# Altium PCB 音频加法器.PcbDoc
Units mm, origin at the board's own origin, x right, y up, seen from the top; angles counter-clockwise.
Board outline 50 x 40 mm, 2 copper layers (Top Layer, Bottom Layer); 14 components, 9 nets, 35 pads, 7 vias.
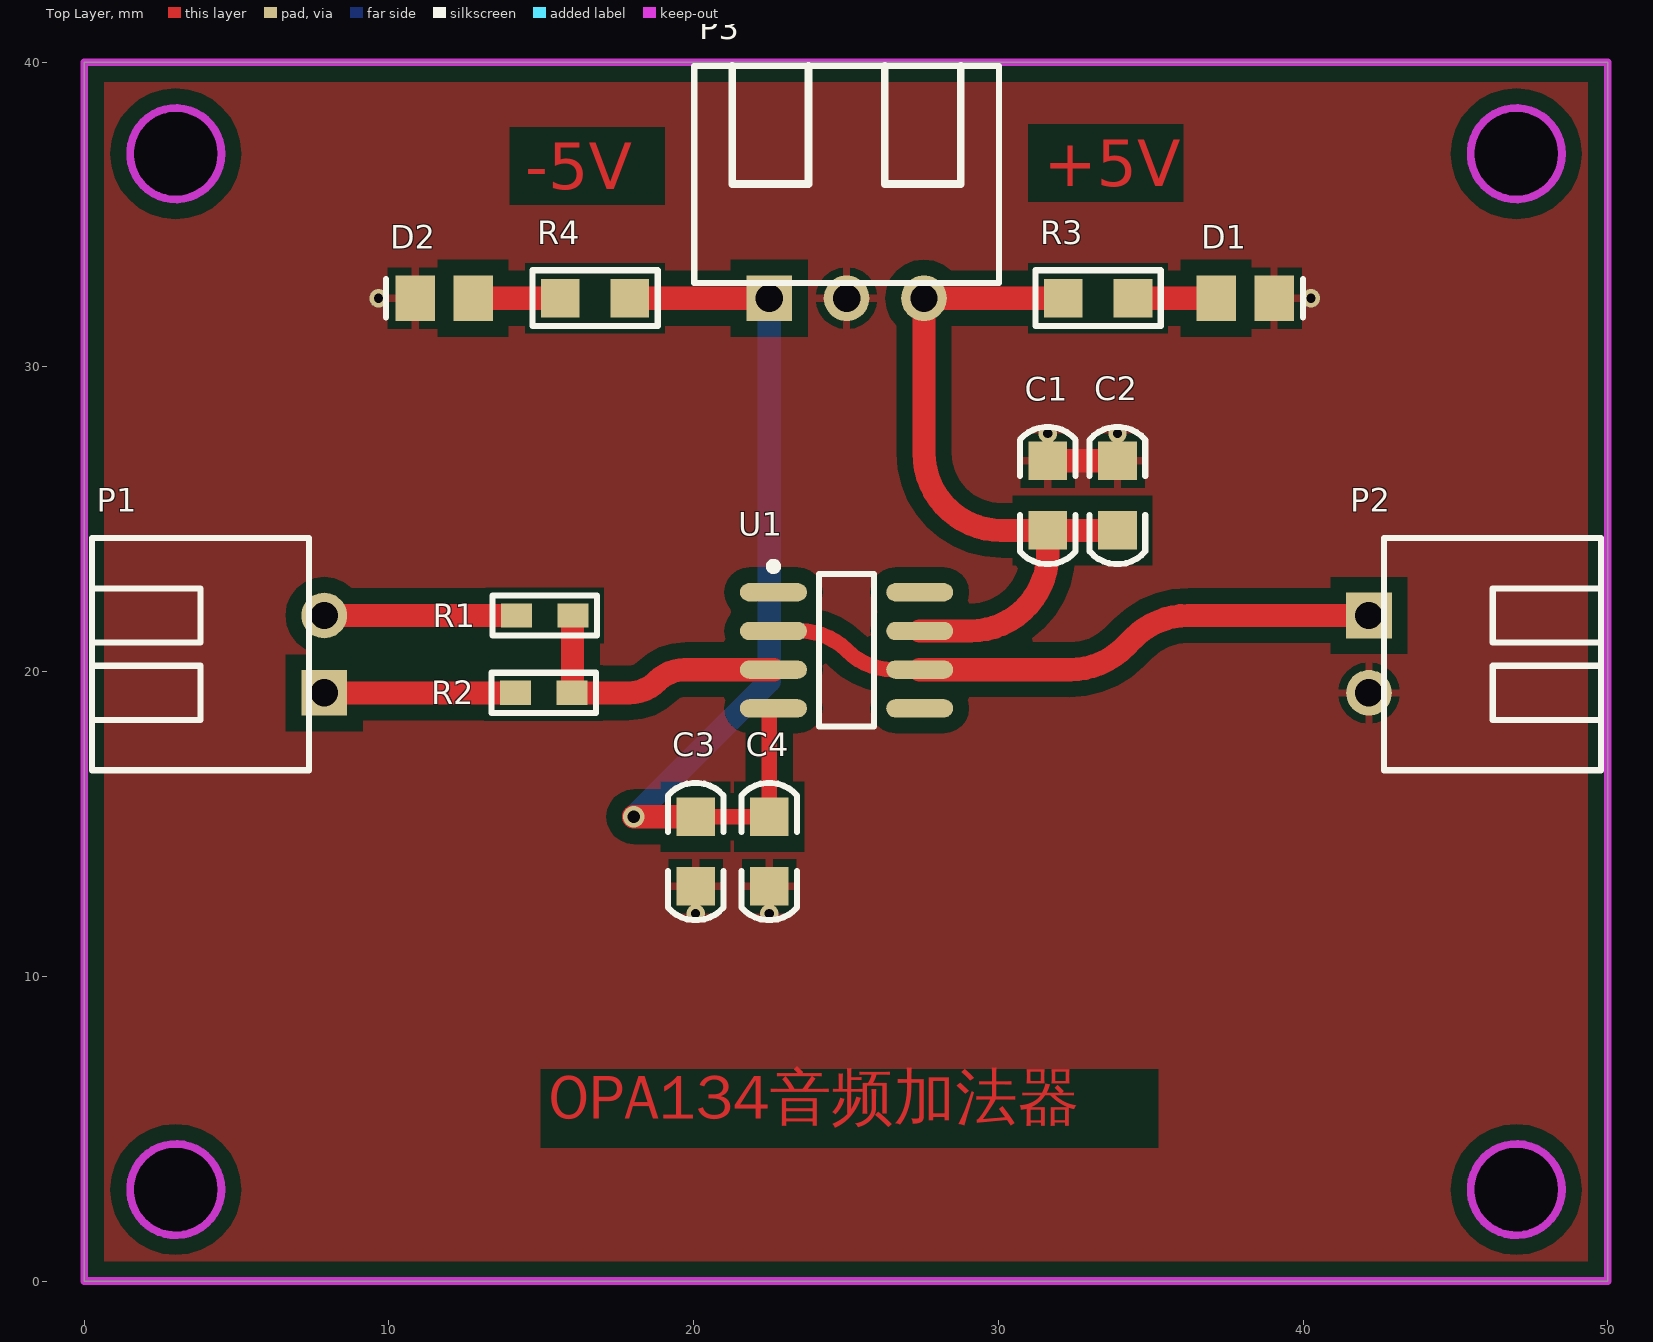
[diagram p0: Top Layer view]
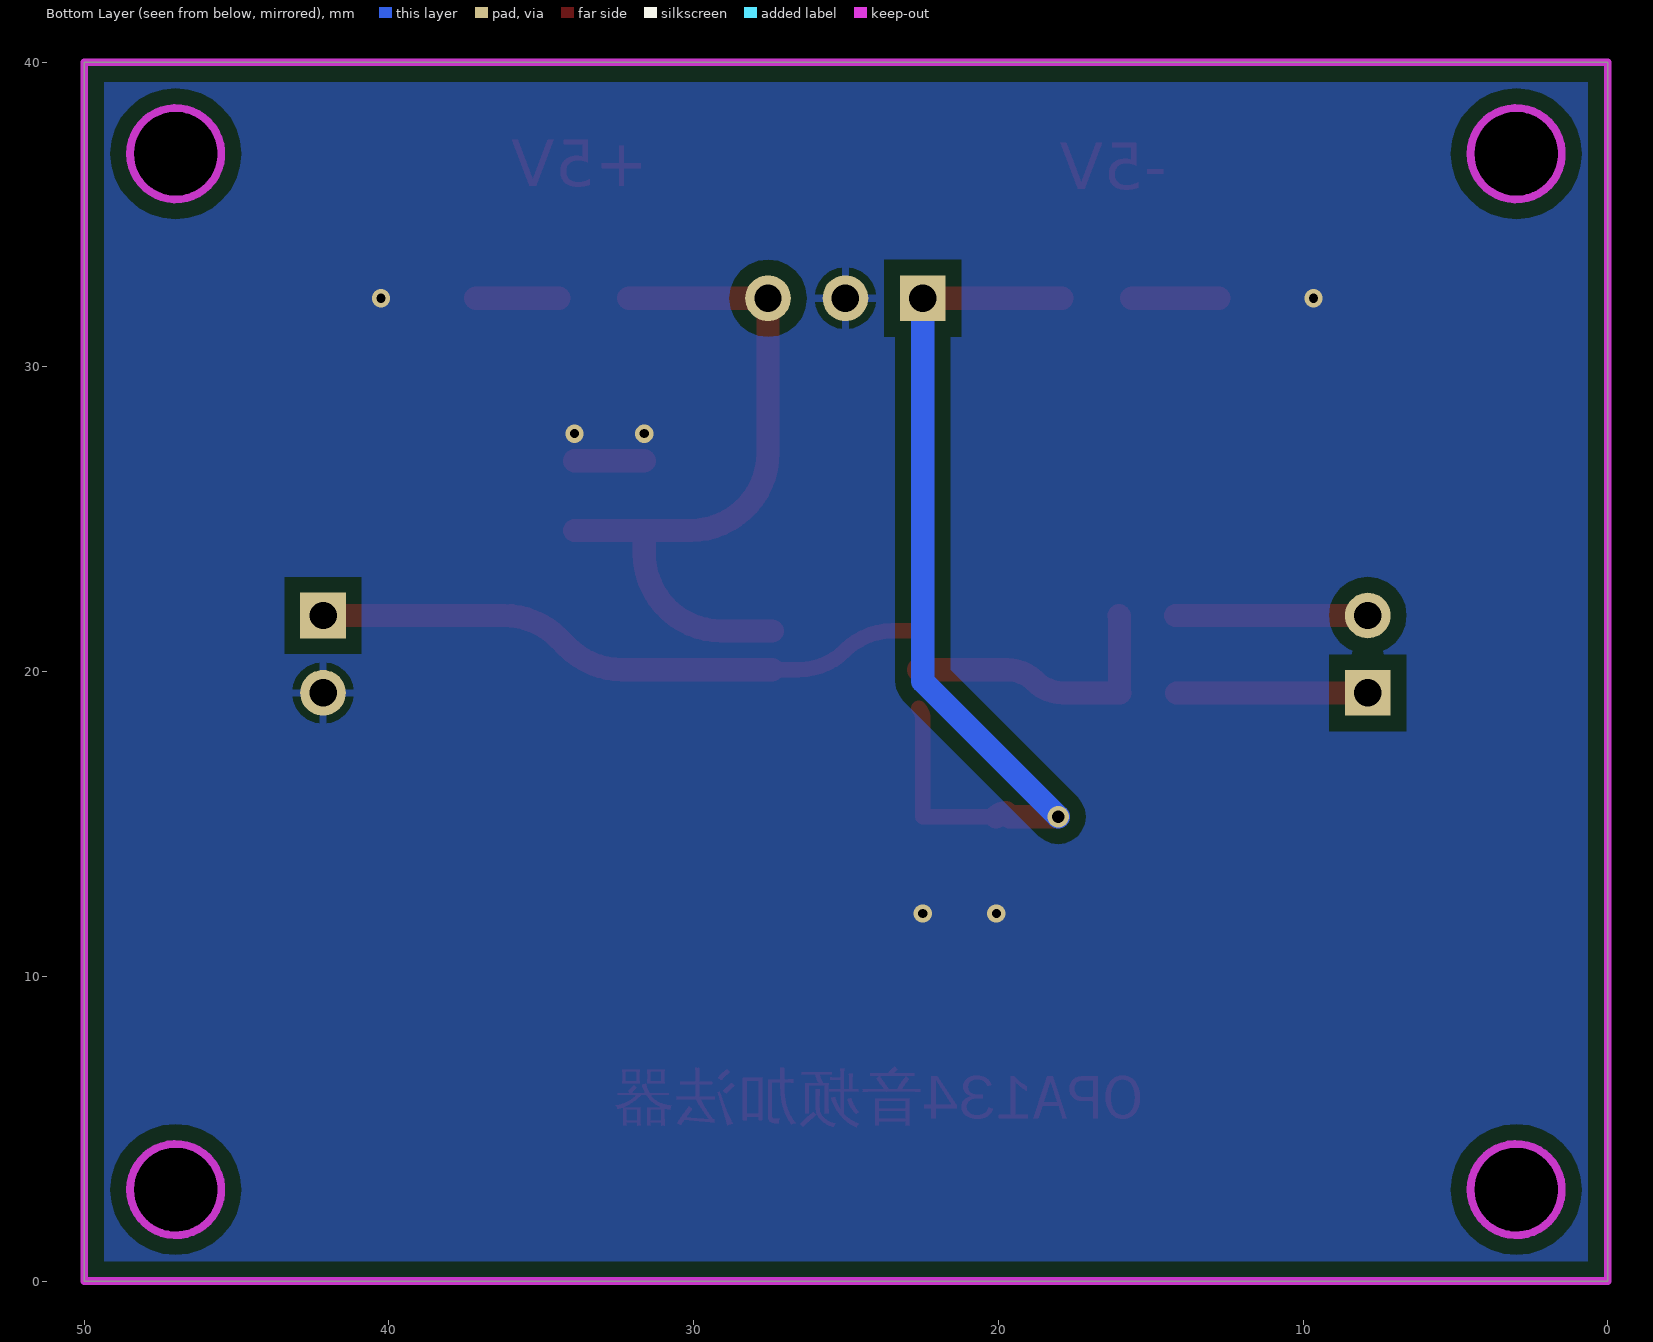
[diagram p1: Bottom Layer view, seen from below]
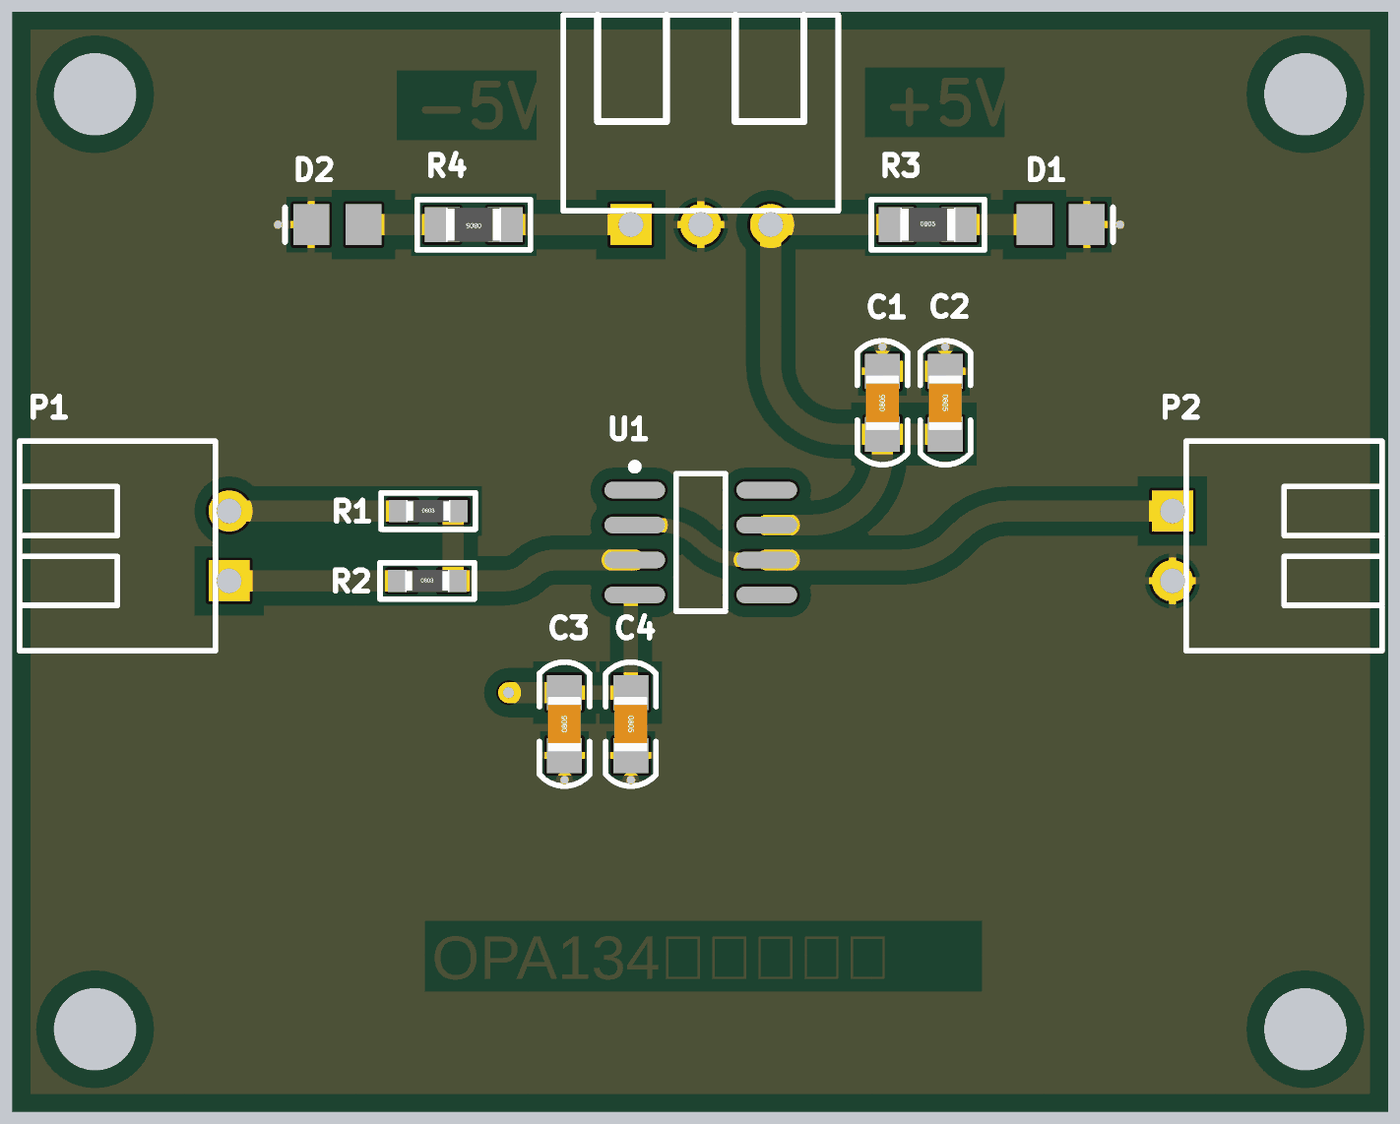
[diagram p2: 3D render of the assembled board from above, using the file's embedded part models]

## Layer stack, top to bottom
Top Solder: solder mask 0.0102, Solder Resist, Dk 3.5
Top Layer: signal copper 0.0356
Dielectric 1: dielectric 0.32, FR-4, Dk 4.8
Bottom Layer: signal copper 0.0356
Bottom Solder: solder mask 0.0102, Solder Resist, Dk 3.5

## Board outline
0,0 50,0 50,40 0,40
cut-out: 45.5,3 ccw(c47,3) 47,1.5 ccw(c47,3) 48.5,3 ccw(c47,3) 47,4.5 ccw(c47,3)
cut-out: 3,1.5 cw(c3,3) 1.5,3 cw(c3,3) 3,4.5 cw(c3,3) 4.5,3 cw(c3,3)
cut-out: 45.5,37 ccw(c47,37) 47,35.5 ccw(c47,37) 48.5,37 ccw(c47,37) 47,38.5 ccw(c47,37)
cut-out: 3,35.5 cw(c3,37) 1.5,37 cw(c3,37) 3,38.5 cw(c3,37) 4.5,37 cw(c3,37)

## Design rules (kind name [scope] priority, off if disabled: settings)
Clearance [All] p1: gap=0.254 ignorepadtopadclearanceinfootprint=FALSE except(0: Arc-Hole Track-Hole SMDPad-Hole THPad-Hole Via-Hole Fill-Hole Poly-Hole Region-Hole Text-Hole; 0.508: Arc-Poly Track-Poly SMDPad-Poly THPad-Poly Via-Poly Fill-Poly Poly-Poly)
MinimumSolderMaskSliver [All] p1: minsoldermaskwidth=0
PlaneConnect [All] p1: pad.planeconnectstyle=Relief pad.reliefexpansion=0.508 pad.reliefentries=4 pad.reliefconductorwidth=0.381 pad.reliefairgap=0.254 via.planeconnectstyle=Direct via.reliefexpansion=0.508 via.reliefentries=4 via.reliefconductorwidth=0.254 via.reliefairgap=0.254
PolygonConnect [All] p1: connectstyle=Relief reliefconductorwidth=0.254 reliefentries=4 polygonreliefangle="90 Angle" airgapwidth=0.254
RoutingVias [All] p1: holewidth=0.711 width=1.524 viastyle="Through Hole" minholewidth=0.3 minwidth=0.6 maxholewidth=0.711 maxwidth=2.54
SilkToSilkClearance [All] p1: silktosilkclearance=0
SilkToSolderMaskClearance [IsPad] p1: minsilkscreentomaskgap=0 clearancetoexposedcopper=TRUE
SolderMaskExpansion [All] p1: expansion=0.102
Width [All] p1: maxlimit=2.54 minlimit=0.254 preferedwidth=0.762
26 further rules are at their usual default settings.

## Components (designator, comment, footprint, x,y, rotation, side; value= is the part's Value field where it differs from the comment)
C1 "1uf" "C 0805" 31.623,25.781 r90 top
C2 "104" "C 0805" 33.909,25.781 r270 top
C3 "104" "C 0805" 20.066,14.097 r90 top
C4 "1uf" "C 0805" 22.479,14.097 r270 top
D1 "LED" LED_0805 38.1,32.258 r0 top
D2 "LED" LED_0805 11.811,32.258 r180 top
P1 "Header 2" HDR2X1_B2 7.874,19.304 r90 top
P2 "Header 2" HDR2X1_B2 42.164,21.844 r270 top
P3 "Header 3" HDR3X1_B2 25.019,32.258 r0 top
R1 "10K" "R 0603" 15.113,21.844 r0 top
R2 "10K" "R 0603" 15.075,19.304 r0 top
R3 "1K" "R 0805" 33.274,32.258 r0 top
R4 "1K" "R 0805" 16.764,32.258 r180 top
U1 "OPA134" SOIC8_N 25.019,20.701 r0 top

## Footprints (in the part's own frame and the unit in brackets; to place one, negate y for a bottom-side part, rotate by r counter-clockwise, add the part's x,y. Pads: shape width x height; smd on the part's side, far side on the other; paste and mask are expansions set on the pad)
"C 0805" [mil] "无极性贴片电容"
  rect 50x50 smd: 1(-45,0) 2(45,0)
  silkscreen extent -89,-36 89,36, body extent -39,-24 39,24, height 20
HDR2X1_B2 [mm] "Connector; Header; 4 Position"
  rect 1.5x1.5 hole 0.9: 1(0,0)
  round 1.5 hole 0.9: 2(2.54,0)
  silkscreen extent -2.54,0.5 5.08,7.62, body extent -2.54,0.38 5.08,7.62, height 5.5
HDR3X1_B2 [mm] "Connector; Header; 3 Position"
  rect 1.5x1.5 hole 0.9: 1(-2.54,0)
  round 1.5 hole 0.9: 2(0,0) 3(2.54,0)
  silkscreen extent -5,0.5 5,7.62, body extent -5,0.5 5,7.62, height 6
LED_0805 [mm] "贴片二极管"
  rect 1.3x1.5 smd: 1(-0.95,0) 2(0.95,0)
  silkscreen extent 1.91,-0.64 1.91,0.64
"R 0603" [mil] "1/10W贴片电阻"
  rect 40x31.5 smd: 1(-36.5,0) 2(36.5,0)
  silkscreen extent -68,-26 68,26, body extent -31,-16 32,16, height 16
"R 0805" [mil] "1/8W贴片电阻"
  rect 50x50 smd: 1(-45,0) 2(45,0)
  silkscreen extent -81,-36 81,36, body extent -39,-25 39,25, height 20
SOIC8_N [mm] "8-Pin Small Outline Integrated Circuit Package (SOIC8), IPC Medium Density"
  oval 2.2x0.6 smd: 1(-2.4,1.905) 2(-2.4,0.635) 3(-2.4,-0.635) 4(-2.4,-1.905) 5(2.4,-1.905) 6(2.4,-0.635) 7(2.4,0.635) 8(2.4,1.905)
  silkscreen extent -2.52,-2.5 0.9,2.88, body extent -1.95,-2.45 1.95,2.45, height 1.75

## Part data
C1 C2 C3 C4: library part C, "无极性贴片电容"
D1 D2: "发光二极管", LatestRevisionDate=08-Jul-2005, LatestRevisionNote="Mech Layer 1 removed.", PackageReference=LED, Published=8-Jun-2000, Publisher="Altium Limited"
P1 P2 P3: "接插件", LatestRevisionDate=17-Jul-2002, LatestRevisionNote="Re-released for DXP Platform.", Publisher="Altium Limited"
R1 R2 R3 R4: library part R, "贴片电阻"
U1: "高性能音频运算放大器"

## Via types
v1: diameter 0.6, hole 0.3, Top Layer to Bottom Layer, tented both sides, 6 vias
v2: diameter 0.7, hole 0.4, Top Layer to Bottom Layer, 1 vias

## Nets (pads, with @x,y where several pads share a name; then routed paths per layer and width w, separated by ;. In a path a pad name is that pad's centre, name@x,y a point inside that pad or via, vN(x,y) a via of type N, cw(c..) or ccw(c..) an arc to the next point about the centre after c; other vN are vias at no path point)
+5V: C1.1 C2.2 P3.3 R3.1 U1.7 | length 23.9
  Top Layer w0.762: U1.7 29.083,21.336 ccw(c29.083,23.876) 31.623,23.876 C1.1 ; R3.1 P3.3 27.559,27.178 ccw(c30.099,27.178) 30.099,24.638 C1.1 ; C2.2 C1.1
-5V: C3.2 C4.1 P3.1 R4.1 U1.4 | length 31.6
  Top Layer w0.508: C3.2 C4.1 22.479,18.458 cw(c22.957,18.458) U1.4
  Top Layer w0.762: R4.1 P3.1 ; v2(18.034,15.24) 19.632,15.24 19.759,15.367 cw(c19.759,14.933) C3.2
  Bottom Layer w0.762: v2(18.034,15.24) 22.479,19.685 P3.1
GND: C1.2 C2.1 C3.1 C4.2 D1.2 D2.2 P2.2 P3.2 | length 2.3
  Top Layer w0.762: C1.2 C2.1
  other v1: 20.066,12.065 22.479,12.065 31.623,27.813 33.909,27.813 9.652,32.258 40.259,32.258
NetD1_1: D1.1 R3.2 | length 2.7
  Top Layer w0.762: R3.2 D1.1
NetD2_1: D2.1 R4.2 | length 2.9
  Top Layer w0.762: D2.1 R4.2
NetP1_1: P1.1 R2.1 | length 6.3
  Top Layer w0.762: P1.1 R2.1
NetP1_2: P1.2 R1.1 | length 6.3
  Top Layer w0.762: P1.2 R1.1
NetP2_1: P2.1 U1.2 U1.6 | length 20.4
  Top Layer w0.508: U1.2 23.486,21.336 cw(c23.486,19.168) 25.019,20.701 ccw(c26.552,22.234) 26.552,20.066 U1.6
  Top Layer w0.762: U1.6 32.349,20.066 ccw(c32.349,22.606) 34.145,20.81 34.435,21.1 cw(c36.231,19.304) 36.231,21.844 P2.1
NetR1_2: R1.2 R2.2 U1.3 | length 9.4
  Top Layer w0.762: R1.2 16.021,21.825 16.021,19.323 R2.2 17.876,19.304 ccw(c17.876,20.605) 18.796,19.685 cw(c19.716,18.765) 19.716,20.066 U1.3
pads on no net: U1.1 U1.5 U1.8

## Polygon pours and split planes (outlines as drawn)
GND on Top Layer "Top Layer-No Net" (solid, remove dead copper, pour order 0): 0,0 50,0 50,40 0,40
GND on Bottom Layer "GND_L02_P001" (solid, remove dead copper, pour order 1): 0,0 50,0 50,40 0,40

## Keep-outs
Keep-Out Layer:
  circle w0.254: c47,3 r1.5
  circle w0.254: c47,37 r1.5
  circle w0.254: c3,37 r1.5
  circle w0.254: c3,3 r1.5
  lines w0.254: 0,0 50,0 50,40 0,40 0,0

## Other copper
Top Layer:
  text "+5V" at 31.496,35.939 h1.52
  text "-5V" at 14.478,35.835 h1.52
  text "OPA134音频加法器" at 15.24,4.826 h2.54